# Altium PCB seeed.PcbDoc
Units mil, origin at the board's own origin, x right, y up, seen from the top; angles counter-clockwise.
Board outline 1968.66 x 1968.66 mil, 2 copper layers (Top Layer, Bottom Layer); 106 components, 0 nets, 348 pads, 0 vias.
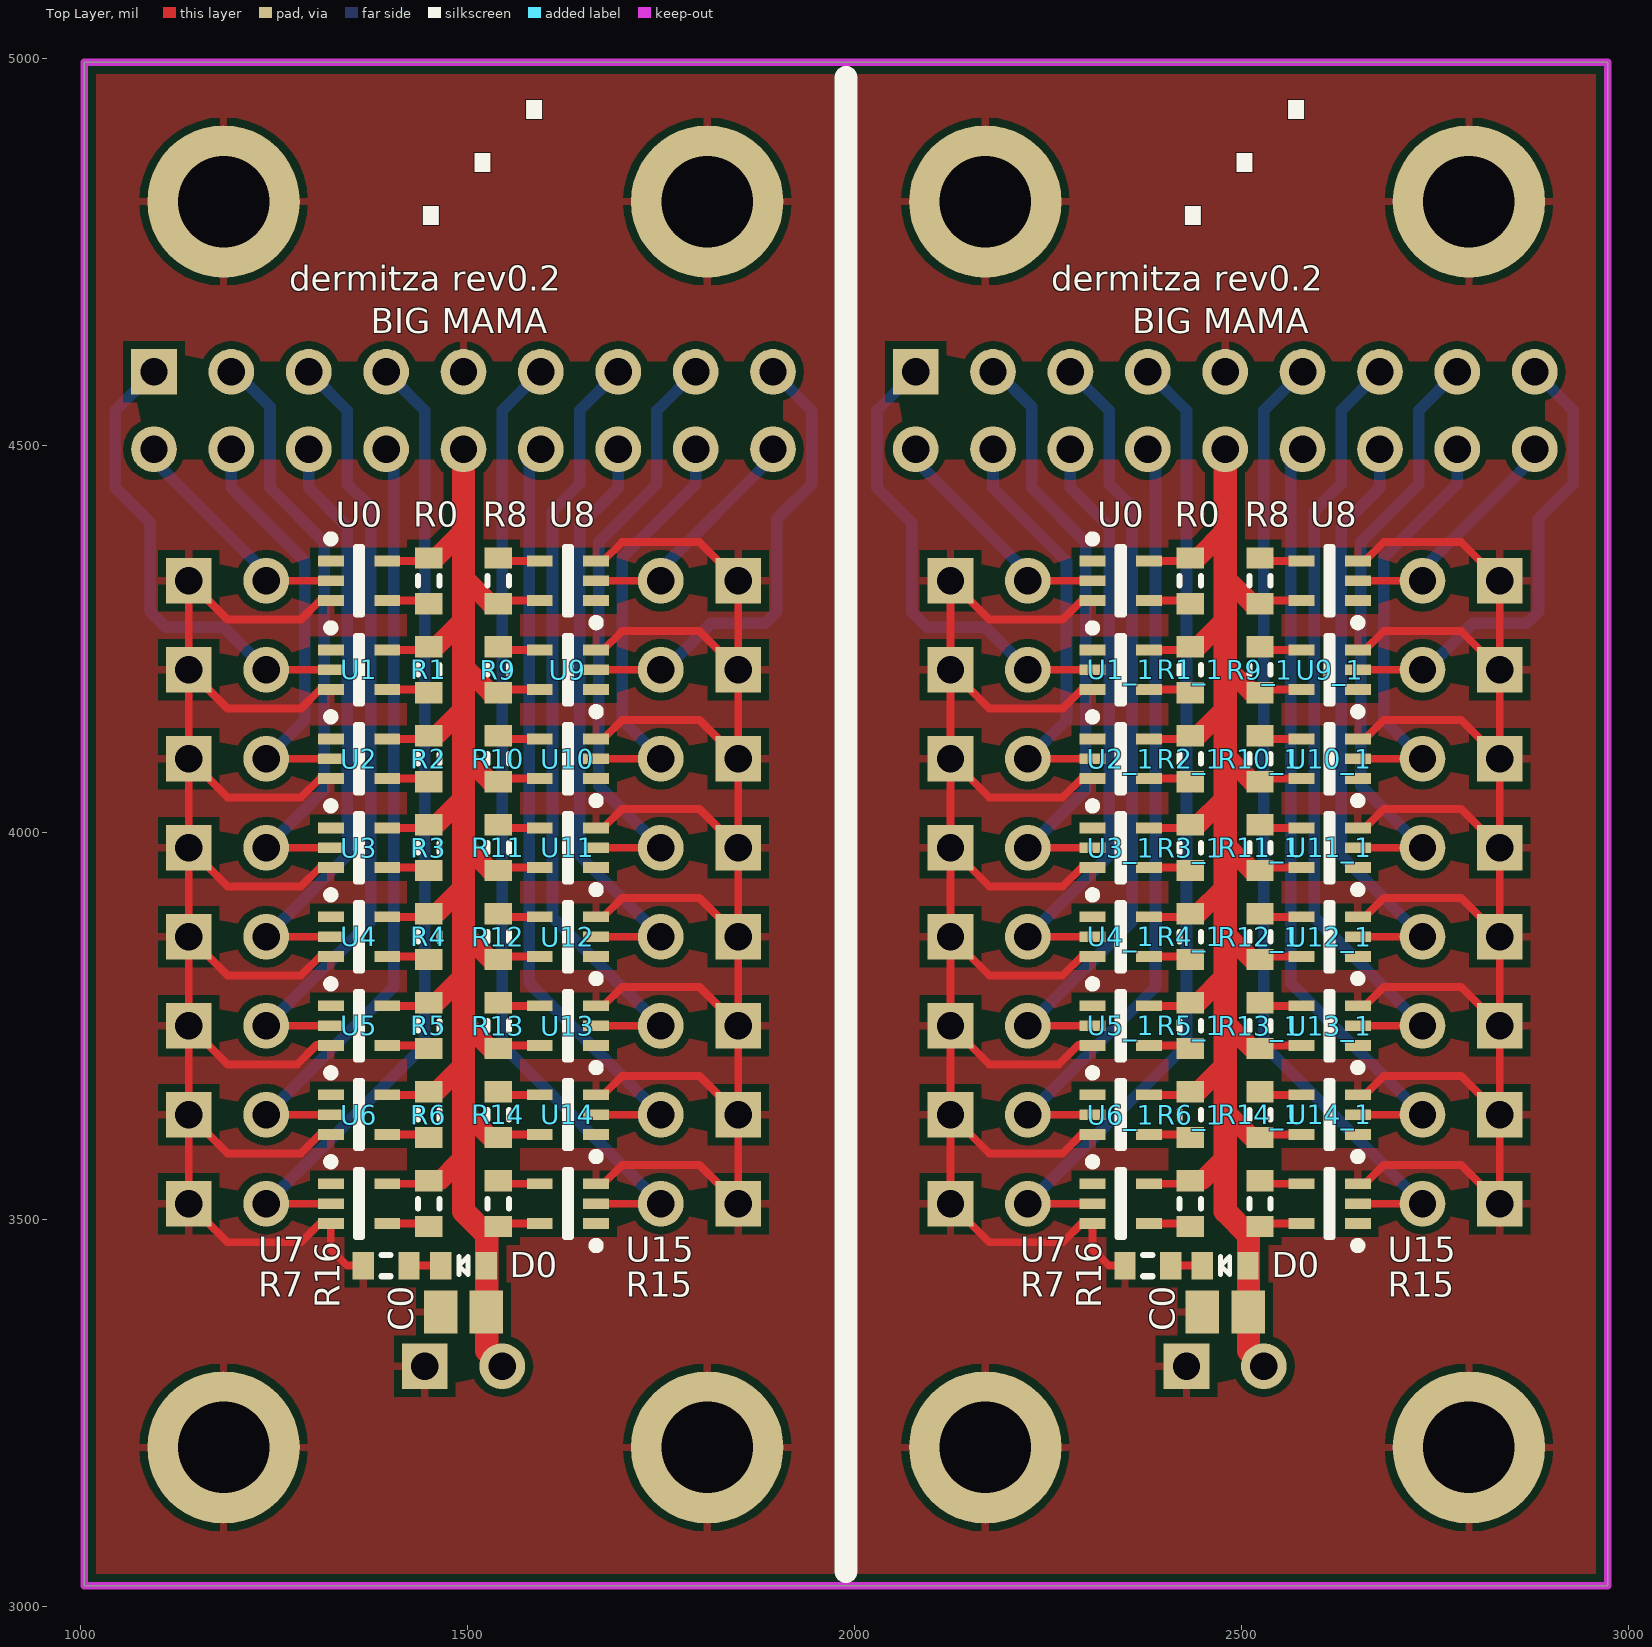
[diagram p0: Top Layer view]
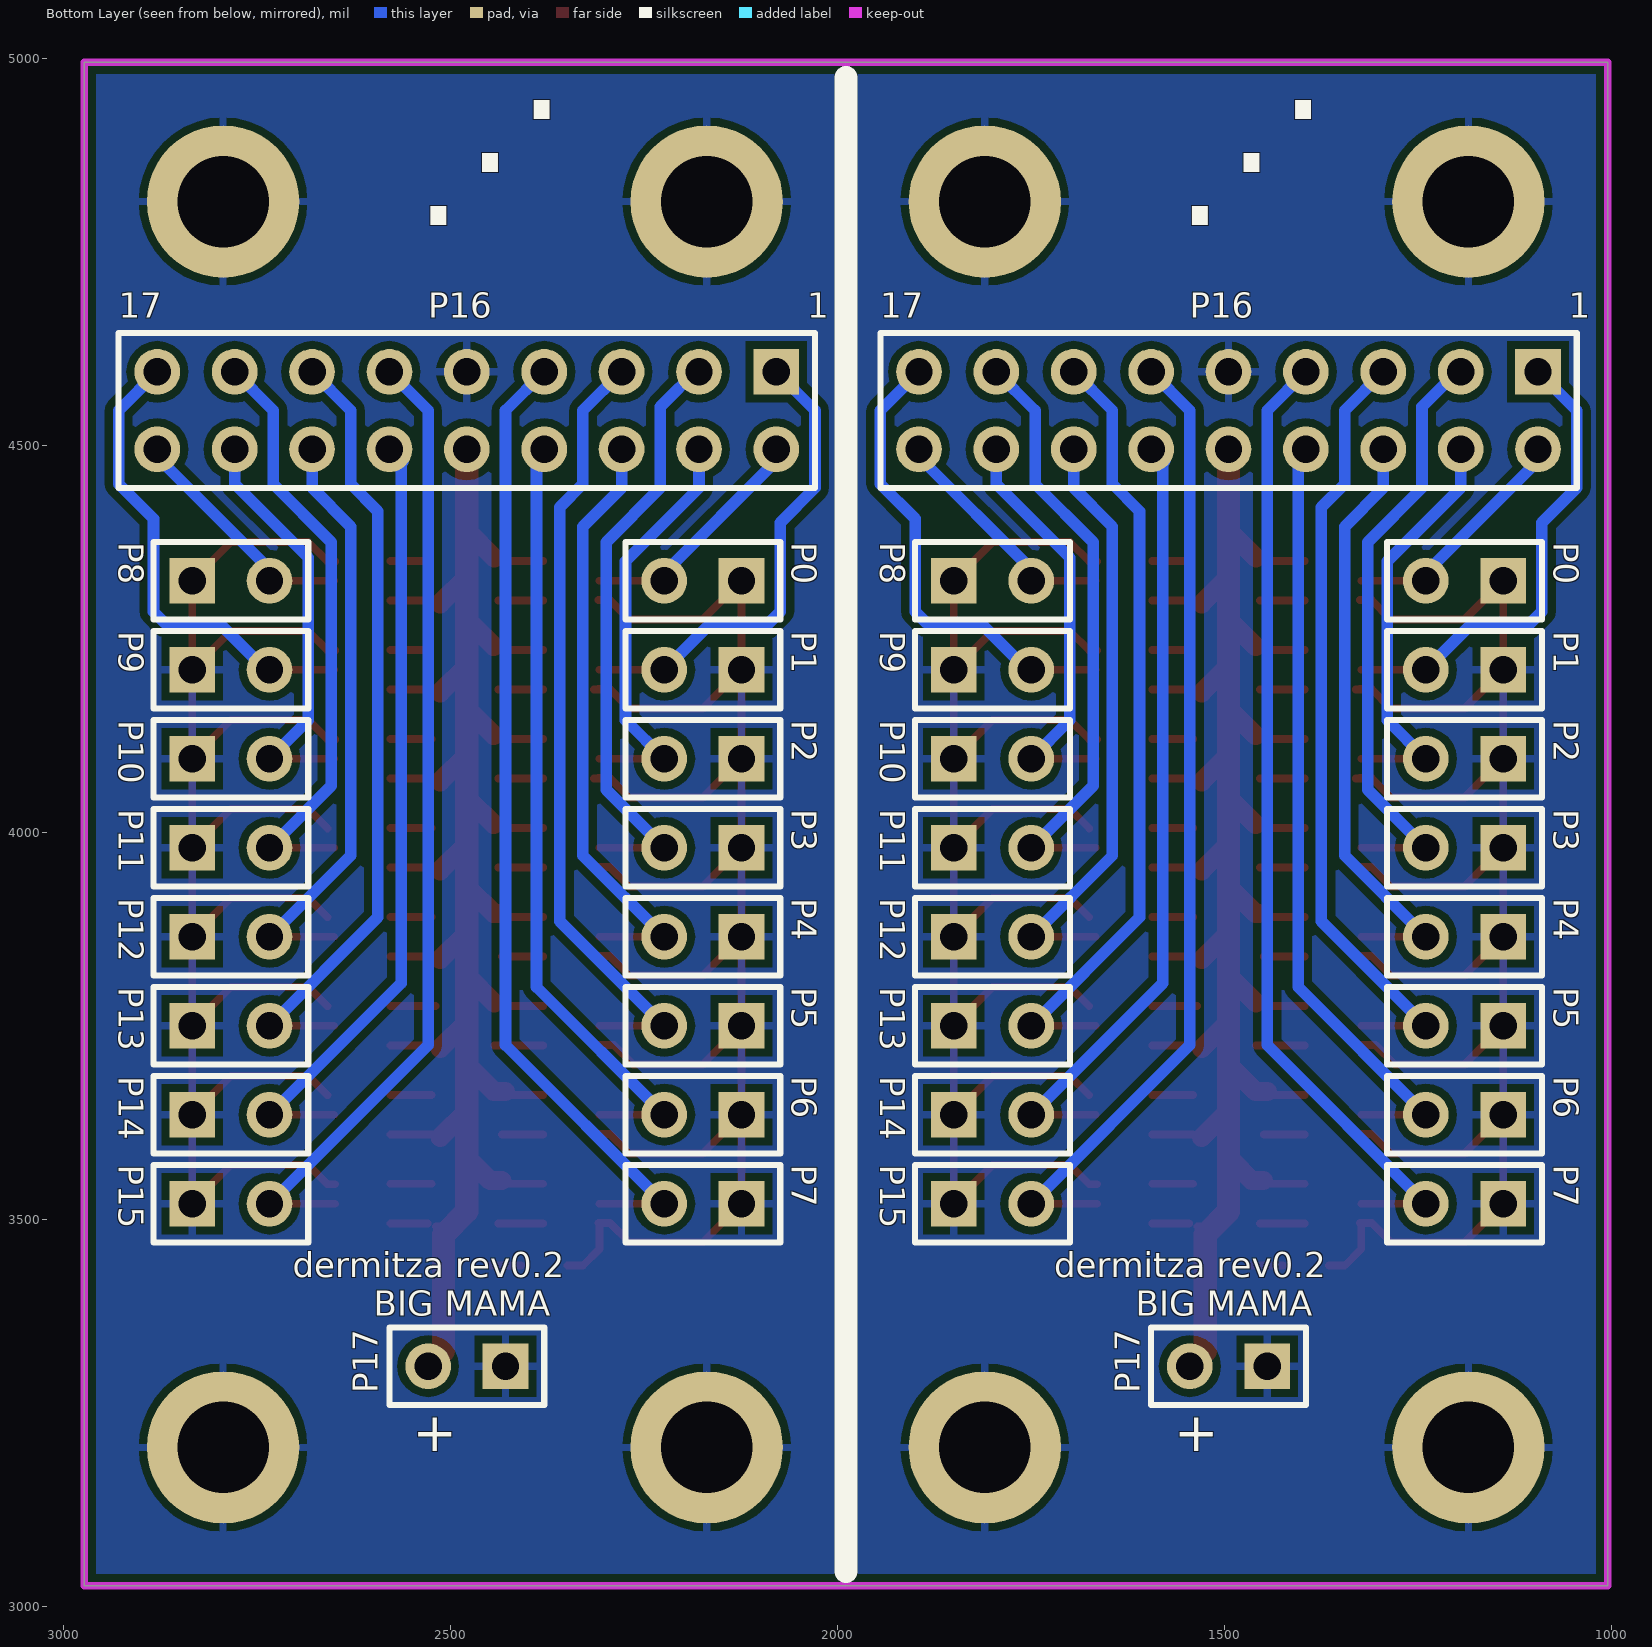
[diagram p1: Bottom Layer view, seen from below]

## Layer stack, top to bottom
Top Layer: signal copper 1.4
Dielectric: dielectric 12.6, FR-4, Dk 4.8
Bottom Layer: signal copper 1.4

## Board outline
1005,4995 1005,3026.34 2973.66,3026.34 2973.66,4995 1005,4995

## Design rules (kind name [scope] priority, off if disabled: settings)
Clearance [All] p1: gap=10
PolygonConnect [All] p1: connectstyle=Relief reliefconductorwidth=10 reliefentries=4 polygonreliefangle="90 Angle"
RoutingVias [All] p1: holewidth=28 width=50 viastyle="Through Hole" minholewidth=28 minwidth=50 maxholewidth=28 maxwidth=50
SilkscreenOverComponentPads [All] p1: minsilkscreentomaskgap=10
SolderMaskExpansion [All] p1: expansion=4
Width [All] p1: maxlimit=10 minlimit=10 preferedwidth=10
27 further rules are at their usual default settings.

## Components (designator, comment, footprint, x,y, rotation, side; value= is the part's Value field where it differs from the comment)
C0 "10uF" 0805_CAP 2479.33,3380 r0 top
C0 "10uF" 0805_CAP 1495,3380 r0 top
D0 "BLUE" 0603_LED 2479.33,3440 r180 top
D0 "BLUE" 0603_LED 1495,3440 r180 top
P0 "S0" HDR1X2 2124.33,4325 r0 bottom
P0 "S0" HDR1X2 1140,4325 r0 bottom
P1 "S0" HDR1X2 2124.33,4210 r0 bottom
P1 "S0" HDR1X2 1140,4210 r0 bottom
P2 "S0" HDR1X2 2124.33,4095 r0 bottom
P2 "S0" HDR1X2 1140,4095 r0 bottom
P3 "S0" HDR1X2 2124.33,3980 r0 bottom
P3 "S0" HDR1X2 1140,3980 r0 bottom
P4 "S0" HDR1X2 2124.33,3865 r0 bottom
P4 "S0" HDR1X2 1140,3865 r0 bottom
P5 "S0" HDR1X2 2124.33,3750 r0 bottom
P5 "S0" HDR1X2 1140,3750 r0 bottom
P6 "S0" HDR1X2 2124.33,3635 r0 bottom
P6 "S0" HDR1X2 1140,3635 r0 bottom
P7 "S0" HDR1X2 2124.33,3520 r0 bottom
P7 "S0" HDR1X2 1140,3520 r0 bottom
P8 "S0" HDR1X2 2834.33,4325 r180 bottom
P8 "S0" HDR1X2 1850,4325 r180 bottom
P9 "S0" HDR1X2 2834.33,4210 r180 bottom
P9 "S0" HDR1X2 1850,4210 r180 bottom
P10 "S0" HDR1X2 2834.33,4095 r180 bottom
P10 "S0" HDR1X2 1850,4095 r180 bottom
P11 "S0" HDR1X2 2834.33,3980 r180 bottom
P11 "S0" HDR1X2 1850,3980 r180 bottom
P12 "S0" HDR1X2 2834.33,3865 r180 bottom
P12 "S0" HDR1X2 1850,3865 r180 bottom
P13 "S0" HDR1X2 2834.33,3750 r180 bottom
P13 "S0" HDR1X2 1850,3750 r180 bottom
P14 "S0" HDR1X2 2834.33,3635 r180 bottom
P14 "S0" HDR1X2 1850,3635 r180 bottom
P15 "S0" HDR1X2 2834.33,3520 r180 bottom
P15 "S0" HDR1X2 1850,3520 r180 bottom
P16 "Header 9X2" HDR2X9 2079.33,4595 r0 bottom
P16 "Header 9X2" HDR2X9 1095,4595 r0 bottom
P17 "Header 2" HDR1X2 2429.33,3310 r0 bottom
P17 "Header 2" HDR1X2 1445,3310 r0 bottom
R0 "5k" 0603_RES 2434.33,4325 r90 top
R0 "5k" 0603_RES 1450,4325 r90 top
R1 "5k" 0603_RES 1450,4210 r90 top
R1_1 "5k" 0603_RES 2434.33,4210 r90 top (schematic designator R1)
R2 "5k" 0603_RES 1450,4095 r90 top
R2_1 "5k" 0603_RES 2434.33,4095 r90 top (schematic designator R2)
R3 "5k" 0603_RES 1450,3980 r90 top
R3_1 "5k" 0603_RES 2434.33,3980 r90 top (schematic designator R3)
R4 "5k" 0603_RES 1450,3865 r90 top
R4_1 "5k" 0603_RES 2434.33,3865 r90 top (schematic designator R4)
R5 "5k" 0603_RES 1450,3750 r90 top
R5_1 "5k" 0603_RES 2434.33,3750 r90 top (schematic designator R5)
R6 "5k" 0603_RES 1450,3635 r90 top
R6_1 "5k" 0603_RES 2434.33,3635 r90 top (schematic designator R6)
R7 "5k" 0603_RES 2434.33,3520 r90 top
R7 "5k" 0603_RES 1450,3520 r90 top
R8 "5k" 0603_RES 2524.33,4325 r270 top
R8 "5k" 0603_RES 1540,4325 r270 top
R9 "5k" 0603_RES 1540,4210 r270 top
R9_1 "5k" 0603_RES 2524.33,4210 r270 top (schematic designator R9)
R10 "5k" 0603_RES 1540,4095 r270 top
R10_1 "5k" 0603_RES 2524.33,4095 r270 top (schematic designator R10)
R11 "5k" 0603_RES 1540,3980 r270 top
R11_1 "5k" 0603_RES 2524.33,3980 r270 top (schematic designator R11)
R12 "5k" 0603_RES 1540,3865 r270 top
R12_1 "5k" 0603_RES 2524.33,3865 r270 top (schematic designator R12)
R13 "5k" 0603_RES 1540,3750 r270 top
R13_1 "5k" 0603_RES 2524.33,3750 r270 top (schematic designator R13)
R14 "5k" 0603_RES 1540,3635 r270 top
R14_1 "5k" 0603_RES 2524.33,3635 r270 top (schematic designator R14)
R15 "5k" 0603_RES 2524.33,3520 r270 top
R15 "5k" 0603_RES 1540,3520 r270 top
R16 "220" 0603_RES 2379.33,3440 r0 top
R16 "220" 0603_RES 1395,3440 r0 top
U0 "PSSI2021SAY" SOT65P210X110-5N 2344.33,4325 r0 top
U0 "PSSI2021SAY" SOT65P210X110-5N 1360,4325 r0 top
U1 "PSSI2021SAY" SOT65P210X110-5N 1360,4210 r0 top
U1_1 "PSSI2021SAY" SOT65P210X110-5N 2344.33,4210 r0 top (schematic designator U1)
U2 "PSSI2021SAY" SOT65P210X110-5N 1360,4095 r0 top
U2_1 "PSSI2021SAY" SOT65P210X110-5N 2344.33,4095 r0 top (schematic designator U2)
U3 "PSSI2021SAY" SOT65P210X110-5N 1360,3980 r0 top
U3_1 "PSSI2021SAY" SOT65P210X110-5N 2344.33,3980 r0 top (schematic designator U3)
U4 "PSSI2021SAY" SOT65P210X110-5N 1360,3865 r0 top
U4_1 "PSSI2021SAY" SOT65P210X110-5N 2344.33,3865 r0 top (schematic designator U4)
U5 "PSSI2021SAY" SOT65P210X110-5N 1360,3750 r0 top
U5_1 "PSSI2021SAY" SOT65P210X110-5N 2344.33,3750 r0 top (schematic designator U5)
U6 "PSSI2021SAY" SOT65P210X110-5N 1360,3635 r0 top
U6_1 "PSSI2021SAY" SOT65P210X110-5N 2344.33,3635 r0 top (schematic designator U6)
U7 "PSSI2021SAY" SOT65P210X110-5N 2344.33,3520 r0 top
U7 "PSSI2021SAY" SOT65P210X110-5N 1360,3520 r0 top
U8 "PSSI2021SAY" SOT65P210X110-5N 2614.33,4325 r180 top
U8 "PSSI2021SAY" SOT65P210X110-5N 1630,4325 r180 top
U9 "PSSI2021SAY" SOT65P210X110-5N 1630,4210 r180 top
U9_1 "PSSI2021SAY" SOT65P210X110-5N 2614.33,4210 r180 top (schematic designator U9)
U10 "PSSI2021SAY" SOT65P210X110-5N 1630,4095 r180 top
U10_1 "PSSI2021SAY" SOT65P210X110-5N 2614.33,4095 r180 top (schematic designator U10)
U11 "PSSI2021SAY" SOT65P210X110-5N 1630,3980 r180 top
U11_1 "PSSI2021SAY" SOT65P210X110-5N 2614.33,3980 r180 top (schematic designator U11)
U12 "PSSI2021SAY" SOT65P210X110-5N 1630,3865 r180 top
U12_1 "PSSI2021SAY" SOT65P210X110-5N 2614.33,3865 r180 top (schematic designator U12)
U13 "PSSI2021SAY" SOT65P210X110-5N 1630,3750 r180 top
U13_1 "PSSI2021SAY" SOT65P210X110-5N 2614.33,3750 r180 top (schematic designator U13)
U14 "PSSI2021SAY" SOT65P210X110-5N 1630,3635 r180 top
U14_1 "PSSI2021SAY" SOT65P210X110-5N 2614.33,3635 r180 top (schematic designator U14)
U15 "PSSI2021SAY" SOT65P210X110-5N 2614.33,3520 r180 top
U15 "PSSI2021SAY" SOT65P210X110-5N 1630,3520 r180 top

## Footprints (in the part's own frame and the unit in brackets; to place one, negate y for a bottom-side part, rotate by r counter-clockwise, add the part's x,y. Pads: shape width x height; smd on the part's side, far side on the other; paste and mask are expansions set on the pad)
0603_LED [mm] "Chip LED, 2-Leads, Body 1.6x0.8mm, IPC High Density"
  rect 0.7x0.9 smd: 1(-0.75,0) 2(0.75,0)
  silkscreen extent -0.15,-0.3 0.15,0.3, body extent -0.85,-0.48 0.85,0.48, height 0.6
0603_RES [mm] "Chip Resistor, 2-Leads, Body 1.6x0.8mm, IPC High Density"
  rect 0.7x0.9 smd: 1(-0.75,0) 2(0.75,0)
  silkscreen extent -0.15,-0.35 0.15,0.35, body extent -0.85,-0.48 0.85,0.48, height 0.6
0805_CAP [mm] "Chip Capacitor, 2-Leads, Body 2.0x1.3mm, IPC High Density"
  rect 1.1x1.4 smd: 1(-0.75,0) 2(0.75,0)
  body extent -1.1,-0.72 1.1,0.73, height 1.1
HDR1X2 [mm] "Connector; Header; 2 Position"
  rect 1.5x1.5 hole 0.9: 1(0,0)
  round 1.5 hole 0.9: 2(2.54,0)
  silkscreen extent -1.27,-1.27 3.81,1.27
HDR2X9 [mm] "Connector; Header; 9x2 Position"
  rect 1.5x1.5 hole 0.9: 1(0,0)
  round 1.5 hole 0.9: 2(0,2.54) 3(2.54,0) 4(2.54,2.54) 5(5.08,0) 6(5.08,2.54) 7(7.62,0) 8(7.62,2.54) 9(10.16,0) 10(10.16,2.54) 11(12.7,0) 12(12.7,2.54) 13(15.24,0) 14(15.24,2.54) 15(17.78,0) 16(17.78,2.54) 17(20.32,0) 18(20.32,2.54)
  silkscreen extent -1.27,-1.27 21.59,3.81
SOT65P210X110-5N [mm] "SOT23, 5-Leads, Body 2.2x2.2mm (max), Pitch 0.65mm, IPC Medium Density"
  rect 0.85x0.35 smd: 1(-0.925,0.65) 2(-0.925,0) 3(-0.925,-0.65) 4(0.925,-0.65) 5(0.925,0.65)
  silkscreen extent -1.05,-1.1 0.1,1.5, body extent -0.67,-1.1 0.67,1.1, height 1.1

## Part data
C0 C0: library part CAP_SMD, "Chip Capacitor"
D0 D0: library part LED_SMD
P0 P0 P1 P1 P2 P2 P3 P3 P4 P4 P5 P5 P6 P6 P7 P7 P8 P8 P9 P9 P10 P10 P11 P11 P12 P12 P13 P13 P14 P14 P15 P15: library part "Header 2", "Header, 2-Pin"
P16 P16: "Header, 9-Pin, Dual row"
P17 P17: "Header, 2-Pin"
R0 R0 R1 R1_1 R2 R2_1 R3 R3_1 R4 R4_1 R5 R5_1 R6 R6_1 R7 R7 R8 R8 R9 R9_1 R10 R10_1 R11 R11_1 R12 R12_1 R13 R13_1 R14 R14_1 R15 R15 R16 R16: library part RES_SMD

## Free pads (board coordinates)
  round 196.85 hole 118.11: 0(1185,4815) 0(2169.33,4815) 1(1810,4815) 1(2794.33,4815) 2(1185,3205) 2(2169.33,3205) 3(1810,3205) 3(2794.33,3205)

## Nets (pads, with @x,y where several pads share a name; then routed paths per layer and width w, separated by ;. In a path a pad name is that pad's centre, name@x,y a point inside that pad or via, vN(x,y) a via of type N, cw(c..) or ccw(c..) an arc to the next point about the centre after c; other vN are vias at no path point)
pads on no net: C0.1 C0.2 D0.1 D0.2 P0.1 P0.2 P1.1 P1.2 P2.1 P2.2 P3.1 P3.2 P4.1 P4.2 P5.1 P5.2 P6.1 P6.2 P7.1 P7.2 P8.1 P8.2 P9.1 P9.2 P10.1 P10.2 P11.1 P11.2 P12.1 P12.2 P13.1 P13.2 P14.1 P14.2 P15.1 P15.2 P16.1 P16.2 P16.3 P16.4 P16.5 P16.6 P16.7 P16.8 P16.9 P16.10 P16.11 P16.12 P16.13 P16.14 P16.15 P16.16 P16.17 P16.18 P17.1 P17.2 R0.1 R0.2 R1.1 R1.2 R1_1.1 R1_1.2 R2.1 R2.2 R2_1.1 R2_1.2 R3.1 R3.2 R3_1.1 R3_1.2 R4.1 R4.2 R4_1.1 R4_1.2 R5.1 R5.2 R5_1.1 R5_1.2 R6.1 R6.2 R6_1.1 R6_1.2 R7.1 R7.2 R8.1 R8.2 R9.1 R9.2 R9_1.1 R9_1.2 R10.1 R10.2 R10_1.1 R10_1.2 R11.1 R11.2 R11_1.1 R11_1.2 R12.1 R12.2 R12_1.1 R12_1.2 R13.1 R13.2 R13_1.1 R13_1.2 R14.1 R14.2 R14_1.1 R14_1.2 R15.1 R15.2 R16.1 R16.2 U0.1 U0.2 U0.3 U0.4 U0.5 U1.1 U1.2 U1.3 U1.4 U1.5 U1_1.1 U1_1.2 U1_1.3 U1_1.4 U1_1.5 U2.1 U2.2 U2.3 U2.4 U2.5 U2_1.1 U2_1.2 U2_1.3 U2_1.4 U2_1.5 U3.1 U3.2 U3.3 U3.4 U3.5 U3_1.1 U3_1.2 U3_1.3 U3_1.4 U3_1.5 U4.1 U4.2 U4.3 U4.4 U4.5 U4_1.1 U4_1.2 U4_1.3 U4_1.4 U4_1.5 U5.1 U5.2 U5.3 U5.4 U5.5 U5_1.1 U5_1.2 U5_1.3 U5_1.4 U5_1.5 U6.1 U6.2 U6.3 U6.4 U6.5 U6_1.1 U6_1.2 U6_1.3 U6_1.4 U6_1.5 U7.1 U7.2 U7.3 U7.4 U7.5 U8.1 U8.2 U8.3 U8.4 U8.5 U9.1 U9.2 U9.3 U9.4 U9.5 U9_1.1 U9_1.2 U9_1.3 U9_1.4 U9_1.5 U10.1 U10.2 U10.3 U10.4 U10.5 U10_1.1 U10_1.2 U10_1.3 U10_1.4 U10_1.5 U11.1 U11.2 U11.3 U11.4 U11.5 U11_1.1 U11_1.2 U11_1.3 U11_1.4 U11_1.5 U12.1 U12.2 U12.3 U12.4 U12.5 U12_1.1 U12_1.2 U12_1.3 U12_1.4 U12_1.5 U13.1 U13.2 U13.3 U13.4 U13.5 U13_1.1 U13_1.2 U13_1.3 U13_1.4 U13_1.5 U14.1 U14.2 U14.3 U14.4 U14.5 U14_1.1 U14_1.2 U14_1.3 U14_1.4 U14_1.5 U15.1 U15.2 U15.3 U15.4 U15.5
copper on no net: | length 43357.9
  Top Layer w10: 1135,3520 1140,3520 ; 1135,3635 1140,3635 ; 1135,3750 1140,3750 ; 1135,3865 1140,3865 ; 1135,3980 1140,3980 ; 1135,4095 1140,4095 ; 1135,4210 1140,4210 ; 1135,4325 1140,4325 ; 1240,3520 1323.58,3520 ; 1240,3635 1323.58,3635 ; 1240,3750 1323.58,3750 ; 1240,3865 1323.58,3865 ; 1240,3980 1323.58,3980 ; 1240,4095 1323.58,4095 ; 1240,4210 1323.58,4210 ; 1240,4325 1323.58,4325 ; 1323.58,3494.41 1323.58,3461.42 1345,3440 1365,3440 ; 1323.58,3609.41 1330.59,3609.41 ; 1323.58,3724.41 1330.59,3724.41 ; 1323.58,3839.41 1330.59,3839.41 ; 1323.58,3954.41 1330.59,3954.41 ; 1323.58,4069.41 1330.59,4069.41 ; 1323.58,4184.41 1330.59,4184.41 ; 1325,3495 1310,3495 1285,3470 1190,3470 1140,3520 ; 1325,3610 1310,3610 1285,3585 1190,3585 1140,3635 ; 1325,3725 1305,3725 1280,3700 1190,3700 1140,3750 ; 1325,3840 1310,3840 1285,3815 1190,3815 1140,3865 ; 1325,3955 1310,3955 1285,3930 1190,3930 1140,3980 ; 1325,4070 1310,4070 1285,4045 1190,4045 1140,4095 ; 1325,4185 1310,4185 1285,4160 1190,4160 1140,4210 ; 1325,4300 1310,4300 1285,4275 1190,4275 1140,4325 ; 1396.42,3494.41 1454.41,3494.41 ; 1396.42,3545.59 1445.59,3545.59 1450,3550 ; 1396.42,3609.41 1449.41,3609.41 ; 1396.42,3660.59 1455.59,3660.59 ; 1396.42,3724.41 1459.41,3724.41 ; 1396.42,3775.59 1450.59,3775.59 ; 1396.42,3839.41 1449.41,3839.41 ; 1396.42,3890.59 1450.59,3890.59 1455,3895 ; 1396.42,3954.41 1454.41,3954.41 ; 1396.42,4005.59 1454.41,4005.59 ; 1396.42,4069.41 1454.41,4069.41 ; 1396.42,4120.59 1450.59,4120.59 ; 1396.42,4184.41 1454.41,4184.41 ; 1396.42,4235.59 1454.41,4235.59 ; 1396.42,4299.41 1454.41,4299.41 ; 1396.42,4350.59 1454.41,4350.59 ; 1424.53,3440 1465.47,3440 ; 1455,3775 1459.53,3779.53 ; 1455,3779.53 1459.53,3779.53 ; 1455,4354.53 1459.53,4354.53 ; 1460.47,3779.53 1459.53,3779.53 ; 1529.53,3490.47 1535,3490.47 ; 1529.53,3605.47 1535,3605.47 ; 1529.53,3720.47 1535,3720.47 ; 1529.53,3835.47 1535,3835.47 ; 1529.53,3950.47 1535,3950.47 ; 1529.53,4065.47 1535,4065.47 ; 1529.53,4180.47 1535,4180.47 ; 1529.53,4295.47 1535,4295.47 ; 1535.59,3775.59 1593.58,3775.59 ; 1540.59,3545.59 1593.58,3545.59 ; 1540.59,3609.41 1593.58,3609.41 ; 1540.59,3660.59 1593.58,3660.59 ; 1540.59,3724.41 1593.58,3724.41 ; 1540.59,3890.59 1593.58,3890.59 ; 1540.59,4005.59 1593.58,4005.59 ; 1540.59,4120.59 1593.58,4120.59 ; 1540.59,4299.41 1593.58,4299.41 ; 1544.41,4235.59 1593.58,4235.59 ; 1545.59,3494.41 1593.58,3494.41 ; 1545.59,3839.41 1593.58,3839.41 ; 1545.59,3954.41 1593.58,3954.41 ; 1545.59,4069.41 1593.58,4069.41 ; 1545.59,4184.41 1593.58,4184.41 ; 1545.59,4350.59 1593.58,4350.59 ; 1665,3520 1666.42,3520 1750,3520 ; 1665,3545 1675,3545 1700,3570 1800,3570 1850,3520 ; 1665,4120 1675,4120 1700,4145 1800,4145 1850,4095 ; 1665,4235 1675,4235 1700,4260 1800,4260 1850,4210 ; 1665,4350 1675,4350 1700,4375 1800,4375 1850,4325 1850,4210 ; 1666.42,3635 1750,3635 ; 1666.42,3750 1750,3750 ; 1666.42,3865 1750,3865 ; 1666.42,3980 1750,3980 ; 1666.42,4095 1750,4095 ; 1666.42,4210 1750,4210 ; 1666.42,4325 1750,4325 ; 1675,3660 1700,3685 1800,3685 1850,3635 ; 1675,3775 1700,3800 1800,3800 1850,3750 ; 1675,3890 1700,3915 1800,3915 1850,3865 ; 1675,4005 1700,4030 1800,4030 1850,3980 ; 1850,3495 1850,3520 ; 2119.33,3520 2124.33,3520 ; 2119.33,3635 2124.33,3635 ; 2119.33,3750 2124.33,3750 ; 2119.33,3865 2124.33,3865 ; 2119.33,3980 2124.33,3980 ; 2119.33,4095 2124.33,4095 ; 2119.33,4210 2124.33,4210 ; 2119.33,4325 2124.33,4325 ; 2224.33,3520 2307.91,3520 ; 2224.33,3635 2307.91,3635 ; 2224.33,3750 2307.91,3750 ; 2224.33,3865 2307.91,3865 ; 2224.33,3980 2307.91,3980 ; 2224.33,4095 2307.91,4095 ; 2224.33,4210 2307.91,4210 ; 2224.33,4325 2307.91,4325 ; 2307.91,3494.41 2307.91,3461.42 2329.33,3440 2349.33,3440 ; 2307.91,3609.41 2314.92,3609.41 ; 2307.91,3724.41 2314.92,3724.41 ; 2307.91,3839.41 2314.92,3839.41 ; 2307.91,3954.41 2314.92,3954.41 ; 2307.91,4069.41 2314.92,4069.41 ; 2307.91,4184.41 2314.92,4184.41 ; 2309.33,3495 2294.33,3495 2269.33,3470 2174.33,3470 2124.33,3520 ; 2309.33,3610 2294.33,3610 2269.33,3585 2174.33,3585 2124.33,3635 ; 2309.33,3725 2289.33,3725 2264.33,3700 2174.33,3700 2124.33,3750 ; 2309.33,3840 2294.33,3840 2269.33,3815 2174.33,3815 2124.33,3865 ; 2309.33,3955 2294.33,3955 2269.33,3930 2174.33,3930 2124.33,3980 ; 2309.33,4070 2294.33,4070 2269.33,4045 2174.33,4045 2124.33,4095 ; 2309.33,4185 2294.33,4185 2269.33,4160 2174.33,4160 2124.33,4210 ; 2309.33,4300 2294.33,4300 2269.33,4275 2174.33,4275 2124.33,4325 ; 2380.75,3494.41 2438.74,3494.41 ; 2380.75,3545.59 2429.92,3545.59 2434.33,3550 ; 2380.75,3609.41 2433.74,3609.41 ; 2380.75,3660.59 2439.92,3660.59 ; 2380.75,3724.41 2443.74,3724.41 ; 2380.75,3775.59 2434.92,3775.59 ; 2380.75,3839.41 2433.74,3839.41 ; 2380.75,3890.59 2434.92,3890.59 2439.33,3895 ; 2380.75,3954.41 2438.74,3954.41 ; 2380.75,4005.59 2438.74,4005.59 ; 2380.75,4069.41 2438.74,4069.41 ; 2380.75,4120.59 2434.92,4120.59 ; 2380.75,4184.41 2438.74,4184.41 ; 2380.75,4235.59 2438.74,4235.59 ; 2380.75,4299.41 2438.74,4299.41 ; 2380.75,4350.59 2438.74,4350.59 ; 2408.86,3440 2449.8,3440 ; 2439.33,3775 2443.86,3779.53 ; 2439.33,3779.53 2443.86,3779.53 ; 2439.33,4354.53 2443.86,4354.53 ; 2444.8,3779.53 2443.86,3779.53 ; 2513.86,3490.47 2519.33,3490.47 ; 2513.86,3605.47 2519.33,3605.47 ; 2513.86,3720.47 2519.33,3720.47 ; 2513.86,3835.47 2519.33,3835.47 ; 2513.86,3950.47 2519.33,3950.47 ; 2513.86,4065.47 2519.33,4065.47 ; 2513.86,4180.47 2519.33,4180.47 ; 2513.86,4295.47 2519.33,4295.47 ; 2519.92,3775.59 2577.91,3775.59 ; 2524.92,3545.59 2577.91,3545.59 ; 2524.92,3609.41 2577.91,3609.41 ; 2524.92,3660.59 2577.91,3660.59 ; 2524.92,3724.41 2577.91,3724.41 ; 2524.92,3890.59 2577.91,3890.59 ; 2524.92,4005.59 2577.91,4005.59 ; 2524.92,4120.59 2577.91,4120.59 ; 2524.92,4299.41 2577.91,4299.41 ; 2528.74,4235.59 2577.91,4235.59 ; 2529.92,3494.41 2577.91,3494.41 ; 2529.92,3839.41 2577.91,3839.41 ; 2529.92,3954.41 2577.91,3954.41 ; 2529.92,4069.41 2577.91,4069.41 ; 2529.92,4184.41 2577.91,4184.41 ; 2529.92,4350.59 2577.91,4350.59 ; 2649.33,3520 2650.75,3520 2734.33,3520 ; 2649.33,3545 2659.33,3545 2684.33,3570 2784.33,3570 2834.33,3520 ; 2649.33,4120 2659.33,4120 2684.33,4145 2784.33,4145 2834.33,4095 ; 2649.33,4235 2659.33,4235 2684.33,4260 2784.33,4260 2834.33,4210 ; 2649.33,4350 2659.33,4350 2684.33,4375 2784.33,4375 2834.33,4325 2834.33,4210 ; 2650.75,3635 2734.33,3635 ; 2650.75,3750 2734.33,3750 ; 2650.75,3865 2734.33,3865 ; 2650.75,3980 2734.33,3980 ; 2650.75,4095 2734.33,4095 ; 2650.75,4210 2734.33,4210 ; 2650.75,4325 2734.33,4325 ; 2659.33,3660 2684.33,3685 2784.33,3685 2834.33,3635 ; 2659.33,3775 2684.33,3800 2784.33,3800 2834.33,3750 ; 2659.33,3890 2684.33,3915 2784.33,3915 2834.33,3865 ; 2659.33,4005 2684.33,4030 2784.33,4030 2834.33,3980 ; 2834.33,3495 2834.33,3520 ; 1140,3520 1140,3635 ; 1140,3635 1140,3750 ; 1140,3750 1140,3865 ; 1140,3865 1140,3980 ; 1140,3980 1140,4095 ; 1140,4095 1140,4210 ; 1140,4210 1140,4325 ; 1850,3520 1850,3635 ; 1850,3635 1850,3750 ; 1850,3750 1850,3865 ; 1850,3865 1850,3980 ; 1850,3980 1850,4095 ; 1850,4095 1850,4210 ; 2124.33,3520 2124.33,3635 ; 2124.33,3635 2124.33,3750 ; 2124.33,3750 2124.33,3865 ; 2124.33,3865 2124.33,3980 ; 2124.33,3980 2124.33,4095 ; 2124.33,4095 2124.33,4210 ; 2124.33,4210 2124.33,4325 ; 2834.33,3520 2834.33,3635 ; 2834.33,3635 2834.33,3750 ; 2834.33,3750 2834.33,3865 ; 2834.33,3865 2834.33,3980 ; 2834.33,3980 2834.33,4095 ; 2834.33,4095 2834.33,4210
  Top Layer w25: 1445,3665 1460,3665 1495,3700 ; 1450,3550 1465,3550 1490,3575 ; 1455,3895 1460,3895 1492.5,3927.5 ; 1459.53,3779.53 1495,3815 ; 1459.53,4354.53 1495,4390 ; 1460,4010 1492.5,4042.5 ; 1460,4125 1495,4160 ; 1460,4240 1495,4275 ; 1495,3640 1529.53,3605.47 ; 1495,3755 1529.53,3720.47 ; 1495,3870 1529.53,3835.47 ; 1495,3985 1529.53,3950.47 ; 1495,4100 1529.53,4065.47 ; 1495,4215 1529.53,4180.47 ; 1495,4330 1529.53,4295.47 ; 2429.33,3665 2444.33,3665 2479.33,3700 ; 2434.33,3550 2449.33,3550 2474.33,3575 ; 2439.33,3895 2444.33,3895 2476.83,3927.5 ; 2443.86,3779.53 2479.33,3815 ; 2443.86,4354.53 2479.33,4390 ; 2444.33,4010 2476.83,4042.5 ; 2444.33,4125 2479.33,4160 ; 2444.33,4240 2479.33,4275 ; 2479.33,3640 2513.86,3605.47 ; 2479.33,3755 2513.86,3720.47 ; 2479.33,3870 2513.86,3835.47 ; 2479.33,3985 2513.86,3950.47 ; 2479.33,4100 2513.86,4065.47 ; 2479.33,4215 2513.86,4180.47 ; 2479.33,4330 2513.86,4295.47
  Top Layer w30: 1495,4495 1495,4390 1495,4330 1495,4275 1495,4215 1495,4100 1495,3985 1495,3870 1495,3755 1495,3640 1495,3510 1525,3480 1525,3330 1545,3310 ; 2479.33,4495 2479.33,4390 2479.33,4330 2479.33,4275 2479.33,4215 2479.33,4100 2479.33,3985 2479.33,3870 2479.33,3755 2479.33,3640 2479.33,3510 2509.33,3480 2509.33,3330 2529.33,3310
  Bottom Layer w10: 1095,4480 1095,4490 ; 1240,4325 1240,4335 ; 1750,4210 1755,4210 ; 1750,4325 1750,4340 ; 1895,4485 1895,4495 ; 2079.33,4480 2079.33,4490 ; 2224.33,4325 2224.33,4335 ; 2734.33,4210 2739.33,4210 ; 2734.33,4325 2734.33,4340 ; 2879.33,4485 2879.33,4495
  Bottom Layer w15: 1095,4480 1240,4335 ; 1095,4595 1045,4545 1045,4445 1090,4400 1090,4285 1110,4265 1185,4265 1240,4210 ; 1195,4495 1195,4445 1290,4350 1290,4145 1240,4095 ; 1195,4600 1245,4550 1245,4445 1315,4375 1315,4055 1240,3980 ; 1240,3520 1445,3725 1445,4545 1395,4595 ; 1240,3635 1405,3800 1405,4485 1395,4495 ; 1240,3750 1375,3885 1375,4420 1345,4450 1345,4545 1295,4595 ; 1240,3865 1345,3970 1345,4395 1295,4445 1295,4495 ; 1580,4480 1580,3805 1750,3635 ; 1595,4595 1545,4545 1545,3725 1750,3520 ; 1695,4495 1695,4445 1645,4395 1645,3970 1750,3865 ; 1695,4595 1645,4545 1645,4450 1610,4415 1610,3890 1750,3750 ; 1750,3980 1670,4060 1670,4375 1745,4450 1745,4545 1795,4595 ; 1750,4095 1700,4145 1700,4355 1795,4450 1795,4495 ; 1750,4340 1895,4485 ; 1755,4210 1815,4270 1885,4270 1900,4285 1900,4405 1945,4450 1945,4545 1895,4595 ; 2079.33,4480 2224.33,4335 ; 2079.33,4595 2029.33,4545 2029.33,4445 2074.33,4400 2074.33,4285 2094.33,4265 2169.33,4265 2224.33,4210 ; 2179.33,4495 2179.33,4445 2274.33,4350 2274.33,4145 2224.33,4095 ; 2179.33,4600 2229.33,4550 2229.33,4445 2299.33,4375 2299.33,4055 2224.33,3980 ; 2224.33,3520 2429.33,3725 2429.33,4545 2379.33,4595 ; 2224.33,3635 2389.33,3800 2389.33,4485 2379.33,4495 ; 2224.33,3750 2359.33,3885 2359.33,4420 2329.33,4450 2329.33,4545 2279.33,4595 ; 2224.33,3865 2329.33,3970 2329.33,4395 2279.33,4445 2279.33,4495 ; 2564.33,4480 2564.33,3805 2734.33,3635 ; 2579.33,4595 2529.33,4545 2529.33,3725 2734.33,3520 ; 2679.33,4495 2679.33,4445 2629.33,4395 2629.33,3970 2734.33,3865 ; 2679.33,4595 2629.33,4545 2629.33,4450 2594.33,4415 2594.33,3890 2734.33,3750 ; 2734.33,3980 2654.33,4060 2654.33,4375 2729.33,4450 2729.33,4545 2779.33,4595 ; 2734.33,4095 2684.33,4145 2684.33,4355 2779.33,4450 2779.33,4495 ; 2734.33,4340 2879.33,4485 ; 2739.33,4210 2799.33,4270 2869.33,4270 2884.33,4285 2884.33,4405 2929.33,4450 2929.33,4545 2879.33,4595
  Bottom Layer w20: 1580,4480 1595,4495 ; 2564.33,4480 2579.33,4495

## Polygon pours and split planes (outlines as drawn)
no net on Bottom Layer "GND2" (solid, remove dead copper, pour order 6): 2974.33,4995 2974.33,3025 1989.33,3025 1989.33,4995 2974.33,4995
no net on Bottom Layer "GND2" (solid, remove dead copper, pour order 6): 1990,4995 1990,3025 1005,3025 1005,4995 1990,4995
no net on Bottom Layer "GND2" (solid, remove dead copper, pour order 7): 2974.33,4995 2974.33,3025 1989.33,3025 1989.33,4995 2974.33,4995
no net on Top Layer "GND" (solid, remove dead copper, pour order 4): 1989.33,4995 1989.33,3025 2974.33,3025 2974.33,4995 1989.33,4995
no net on Top Layer "GND" (solid, remove dead copper, pour order 4): 1005,4995 1005,3025 1990,3025 1990,4995 1005,4995
no net on Top Layer "GND" (solid, remove dead copper, pour order 5): 1989.33,4995 1989.33,3025 2974.33,3025 2974.33,4995 1989.33,4995

## Keep-outs
Keep-Out Layer:
  lines w10: 1989.33,3026.34 1989.33,4995 ; 1989.33,3026.34 1005,3026.34 1005,4995 1989.33,4995 ; 1989.33,3026.34 2973.66,3026.34 2973.66,4995 1989.33,4995

## Silkscreen, mask and mechanical layers (free items; w line width, h text height)
Top Overlay:
  lines w30: 1989.33,3045 1989.33,4975
  text "⋰" at 1420,4755 h250
  text "⋰" at 2404.33,4755 h250
  text "dermitza rev0.2" at 1270,4700 h32
  text "dermitza rev0.2" at 2254.33,4700 h32
  text "BIG MAMA" at 1375,4645 h32
  text "BIG MAMA" at 2359.33,4645 h32
Bottom Overlay:
  lines w30: 1989.33,3045 1989.33,4975
  text "⋰" at 1565,4755 h250
  text "⋰" at 2549.33,4755 h250
  text "dermitza rev0.2" at 1720,3425 h32
  text "dermitza rev0.2" at 2704.33,3425 h32
  text "BIG MAMA" at 1615,3375 h32
  text "BIG MAMA" at 2599.33,3375 h32
  text "+" at 1565,3200 h50
  text "+" at 2549.33,3200 h50

## Text inside footprints (layer, text, board x,y; h text height)
P16: Bottom Overlay "17" at 2929.33,4665 h32; Bottom Overlay "1" at 2039.33,4665 h32
P16: Bottom Overlay "17" at 1945,4665 h32; Bottom Overlay "1" at 1055,4665 h32